# Altium PCB Array.PcbDoc
Units mm, origin at the board's own origin, x right, y up, seen from the top; angles counter-clockwise.
Board outline 125.5 x 125.5 mm, 2 copper layers (Top Layer, Bottom Layer); 20 components, 18 nets, 80 pads, 124 vias.
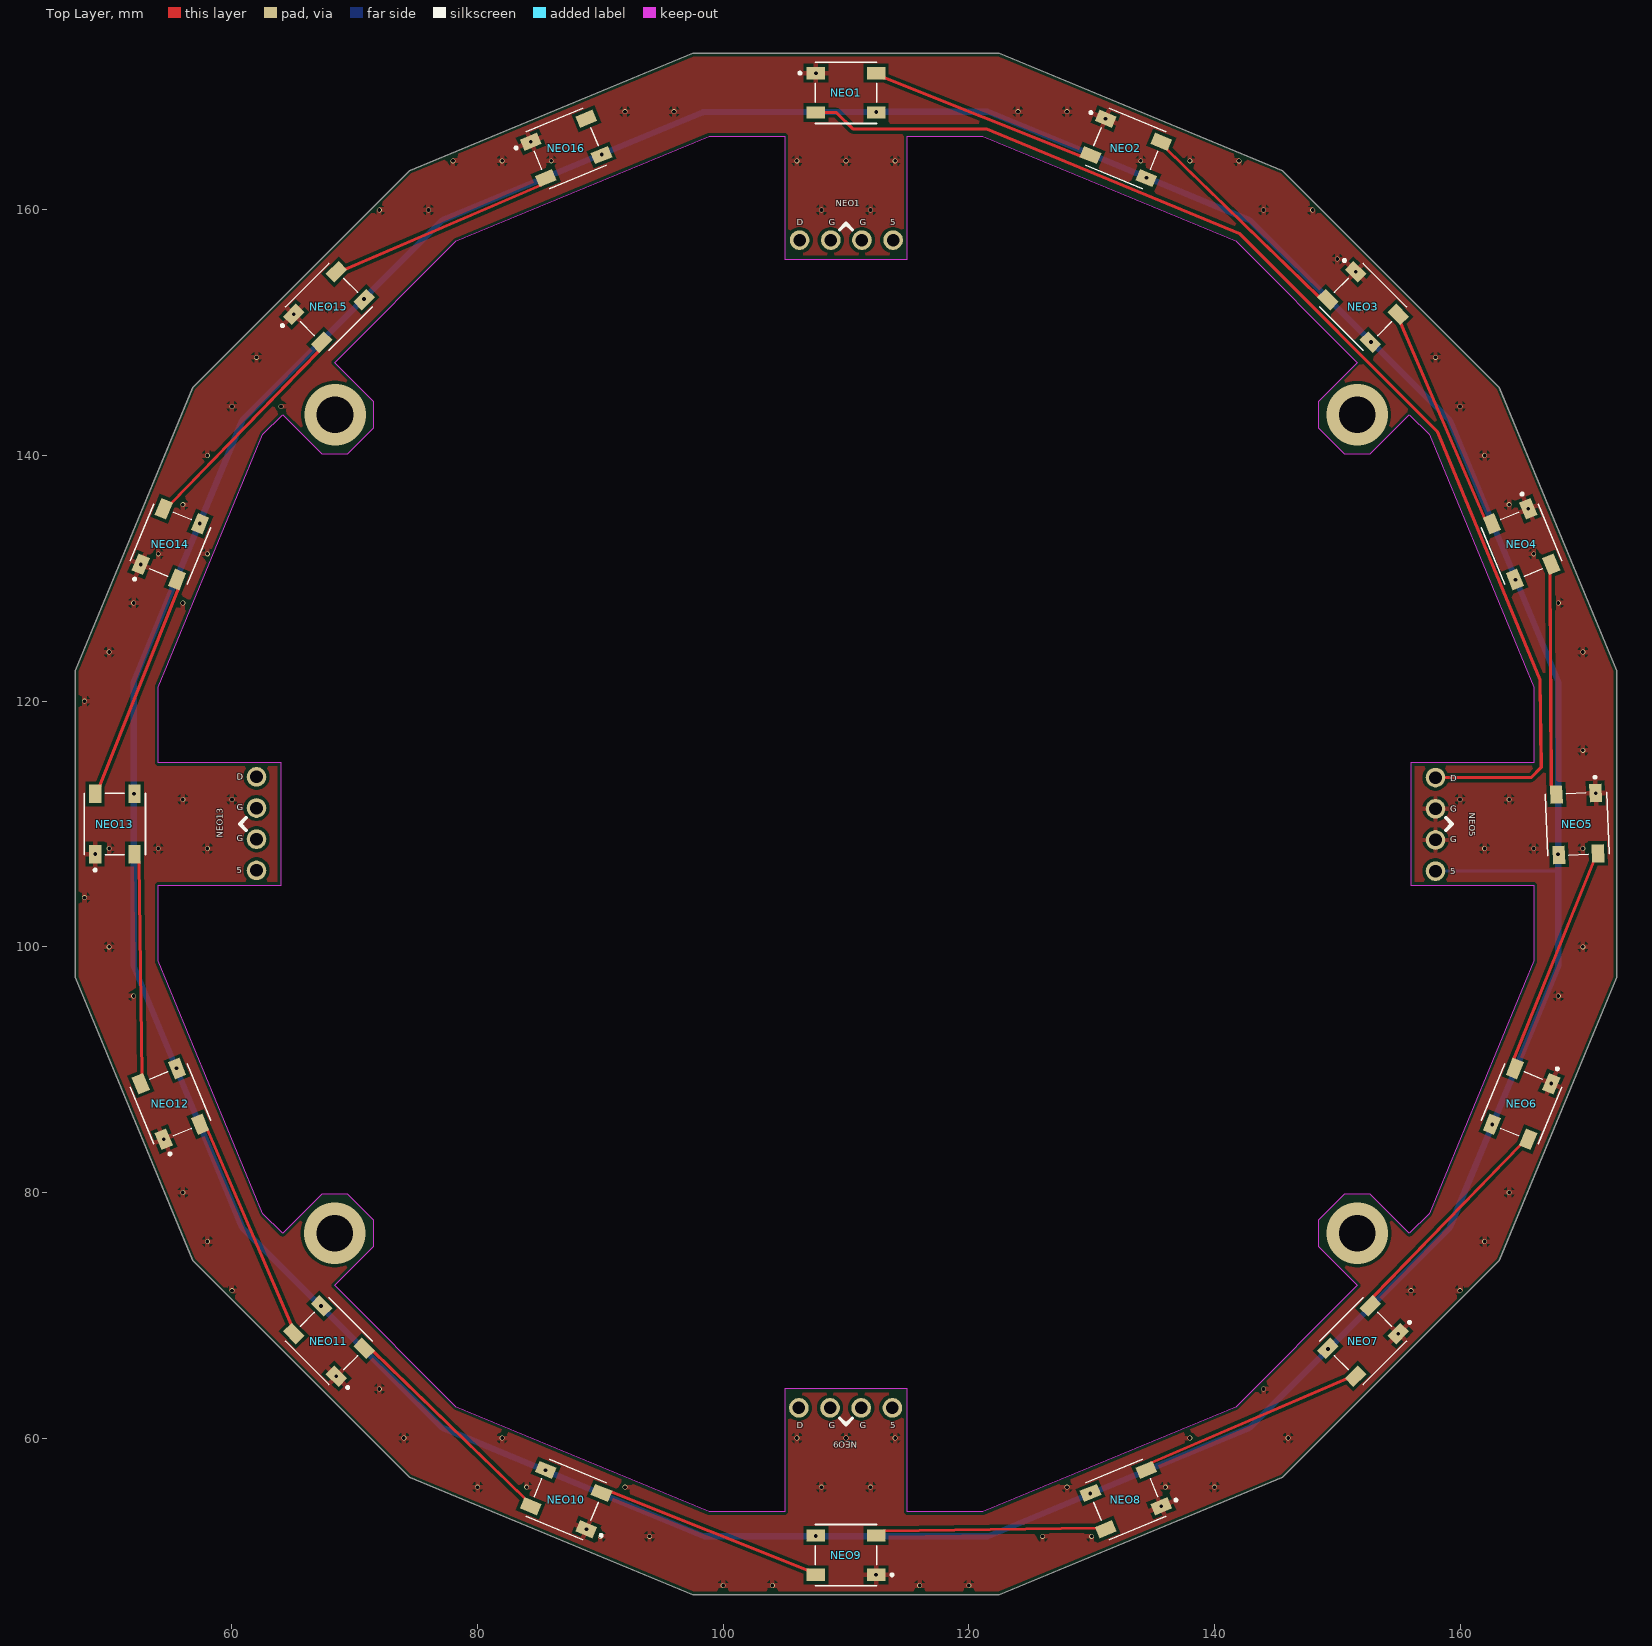
[diagram p0: Top Layer view]
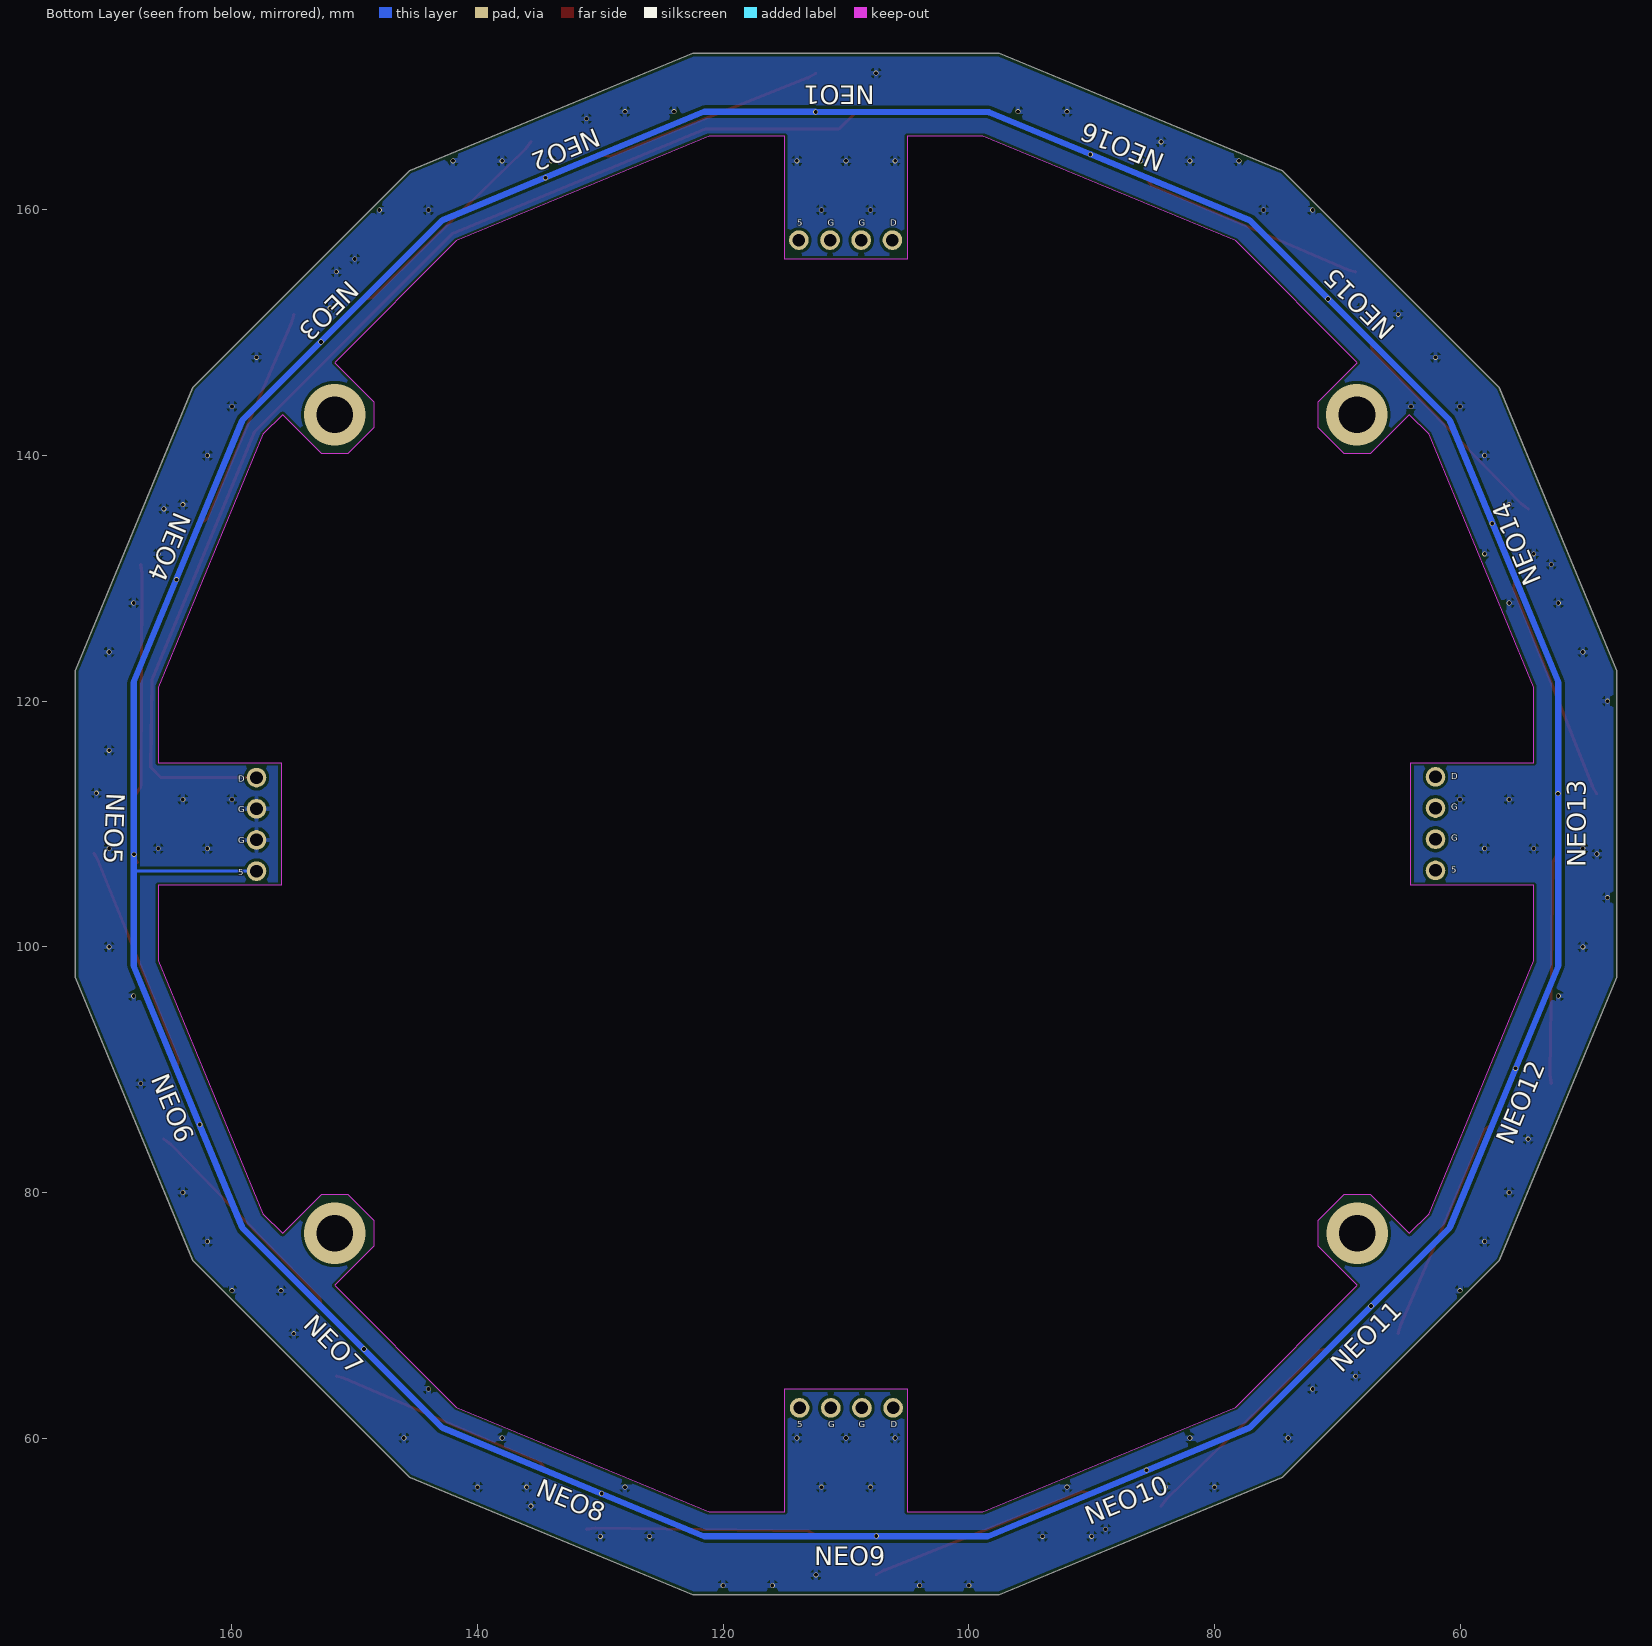
[diagram p1: Bottom Layer view, seen from below]
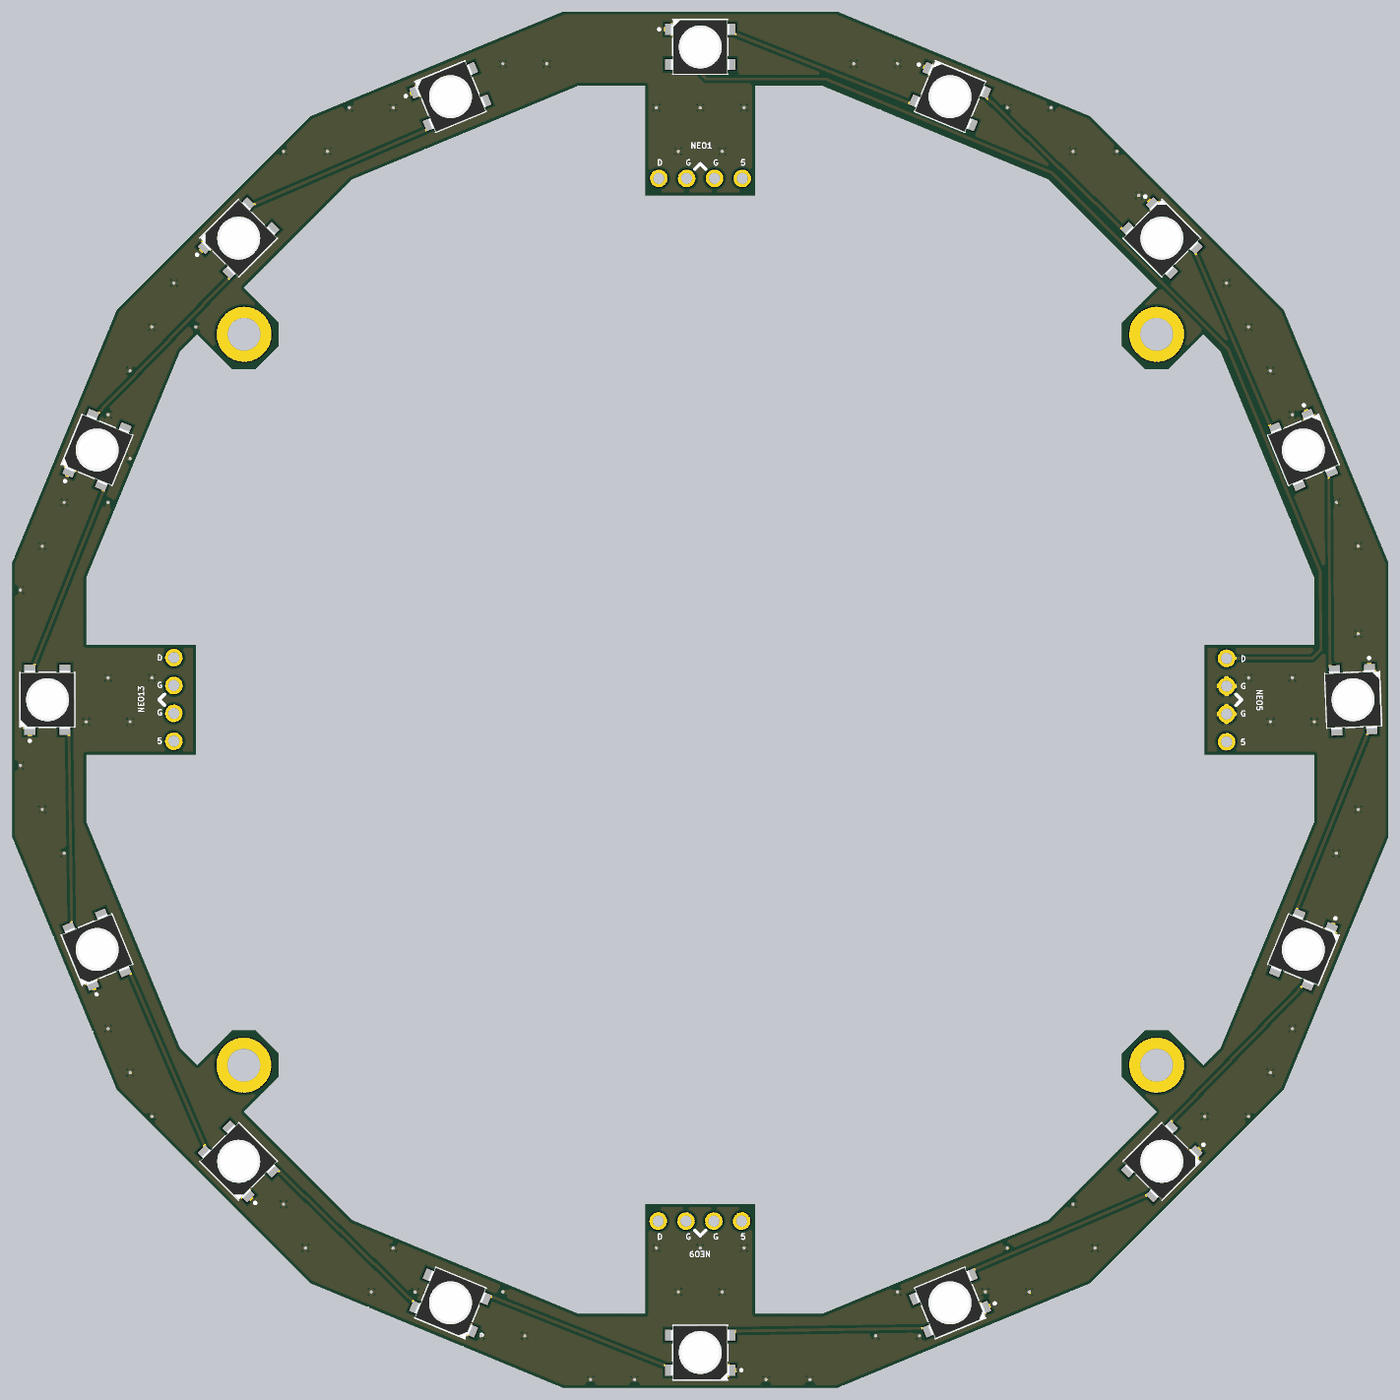
[diagram p2: 3D render of the assembled board from above, using the file's embedded part models]

## Layer stack, top to bottom
Top Solder: solder mask 0.0102, Solder Resist, Dk 3.5
Top Layer: signal copper 0.0356
Dielectric 1: dielectric 0.32, FR-4, Dk 4.8
Bottom Layer: signal copper 0.0356
Bottom Solder: solder mask 0.0102, Solder Resist, Dk 3.5

## Board outline
56.803,74.455 47.25,97.518 47.25,122.482 56.803,145.545 74.455,163.197 97.518,172.75 122.482,172.75 145.545,163.197 163.197,145.545 172.75,122.482 172.75,97.518 163.197,74.455 145.545,56.803 122.482,47.25 97.518,47.25 74.455,56.803
cut-out: 64.136,76.668 62.525,78.279 54,98.861 54,105 64,105 64,115 54,115 54,121.139 62.525,141.721 64.136,143.332 67.318,140.15 69.44,140.15 71.561,142.272 71.561,144.393 68.379,147.575 78.279,157.475 98.861,166 105,166 105,156 115,156 115,166 121.139,166 141.721,157.475 151.621,147.575 148.439,144.393 148.439,142.272 150.56,140.15 152.682,140.15 155.864,143.332 157.475,141.721 166,121.139 166,115 156,115 156,105 166,105 166,98.861 157.475,78.279 155.864,76.668 152.682,79.85 150.56,79.85 148.439,77.728 148.439,75.607 151.621,72.425 141.721,62.525 121.139,54 115,54 115,64 105,64 105,54 98.861,54 78.279,62.525 68.379,72.425 71.561,75.607 71.561,77.728 69.44,79.85 67.318,79.85

## Design rules (kind name [scope] priority, off if disabled: settings)
BoardOutlineClearance [All] p1: gap=0.254 ignorepadtopadclearanceinfootprint=FALSE except(0: Arc-SplitContinuation Track-SplitContinuation SMDPad-SplitContinuation THPad-SplitContinuation Via-SplitContinuation Fill-SplitContinuation Poly-SplitContinuation Region-SplitContinuation Text-SplitContinuation)
Clearance [All] p1: gap=0.254 ignorepadtopadclearanceinfootprint=FALSE
PolygonConnect [All] p1: connectstyle=Relief reliefconductorwidth=0.4 reliefentries=4 polygonreliefangle="90 Angle" airgapwidth=0.254
RoutingVias [All] p1: holewidth=0.711 width=1.27 viastyle="Through Hole" minholewidth=0.711 minwidth=1.27 maxholewidth=0.711 maxwidth=1.27
SolderMaskExpansion [All] p1: expansion=0.102 istentingtop=FALSE
SupplyNets "Schematic Supply Nets_1" [InNet('+5V')] p1: voltage=0.000
SupplyNets "Schematic Supply Nets" [InNet('GND')] p2: voltage=0.000
Width [All] p1: maxlimit=100 minlimit=0.254 preferedwidth=0.254
30 further rules are at their usual default settings.

## Classes and differential pairs
component class NeoArray: g NEO1 NEO2 NEO3 NEO4 NEO5 NEO6 NEO7 NEO8 NEO9 NEO10 NEO11 NEO12 NEO13 NEO14 NEO15 NEO16

## Components (designator, comment, footprint, x,y, rotation, side; value= is the part's Value field where it differs from the comment)
NEO1 "NEOPIXEL-ARRAY" NEOPIXEL-ARRAY 110,157.54 r180 top
NEO1 "NEOPIXEL-5050" NEOPIXEL-5050 110,169.54 r180 top
NEO2 "NEOPIXEL-5050" NEOPIXEL-5050 132.785,165.008 r157.5 top
NEO3 "NEOPIXEL-5050" NEOPIXEL-5050 152.101,152.101 r135 top
NEO4 "NEOPIXEL-5050" NEOPIXEL-5050 165.008,132.785 r112.5 top
NEO5 "NEOPIXEL-ARRAY" NEOPIXEL-ARRAY 158,110 r90 top
NEO5 "NEOPIXEL-5050" NEOPIXEL-5050 169.54,110 r92.25 top
NEO6 "NEOPIXEL-5050" NEOPIXEL-5050 165.008,87.215 r67.5 top
NEO7 "NEOPIXEL-5050" NEOPIXEL-5050 152.101,67.899 r45 top
NEO8 "NEOPIXEL-5050" NEOPIXEL-5050 132.785,54.992 r22.5 top
NEO9 "NEOPIXEL-ARRAY" NEOPIXEL-ARRAY 110,62.46 r0 top
NEO9 "NEOPIXEL-5050" NEOPIXEL-5050 110,50.46 r0 top
NEO10 "NEOPIXEL-5050" NEOPIXEL-5050 87.215,54.992 r337.5 top
NEO11 "NEOPIXEL-5050" NEOPIXEL-5050 67.899,67.899 r315 top
NEO12 "NEOPIXEL-5050" NEOPIXEL-5050 54.992,87.215 r292.5 top
NEO13 "NEOPIXEL-ARRAY" NEOPIXEL-ARRAY 62,110 r270 top
NEO13 "NEOPIXEL-5050" NEOPIXEL-5050 50.46,110 r270 top
NEO14 "NEOPIXEL-5050" NEOPIXEL-5050 54.992,132.785 r247.5 top
NEO15 "NEOPIXEL-5050" NEOPIXEL-5050 67.899,152.101 r225 top
NEO16 "NEOPIXEL-5050" NEOPIXEL-5050 87.215,165.008 r202.5 top

## Footprints (in the part's own frame and the unit in brackets; to place one, negate y for a bottom-side part, rotate by r counter-clockwise, add the part's x,y. Pads: shape width x height; smd on the part's side, far side on the other; paste and mask are expansions set on the pad)
NEOPIXEL-5050 [mm]
  rect 1.5x1 smd: 1(2.45,-1.6) 2(2.45,1.6) 3(-2.45,1.6) 4(-2.45,-1.6)
  silkscreen extent -2.5,-2.5 3.85,2.5, body extent -2.7,-2.49 2.7,2.51, height 1.5
NEOPIXEL-ARRAY [mm]
  round 1.6 hole 1.02: DIN(3.78,0) GND(-1.3,0) GND(1.24,0) VCC(-3.84,0)
  silkscreen extent -0.5,-1.35 0.5,-0.85

## Via types
v1: diameter 0.4, hole 0.3, Top Layer to Bottom Layer, tented both sides, 120 vias
v2: diameter 5, hole 3, Top Layer to Bottom Layer, 4 vias

## Nets (pads, with @x,y where several pads share a name; then routed paths per layer and width w, separated by ;. In a path a pad name is that pad's centre, name@x,y a point inside that pad or via, vN(x,y) a via of type N, cw(c..) or ccw(c..) an arc to the next point about the centre after c; other vN are vias at no path point)
+5V: NEO1.3 NEO2.3 NEO3.3 NEO4.3 NEO5.3 NEO5.VCC NEO6.3 NEO7.3 NEO8.3 NEO9.3 NEO10.3 NEO11.3 NEO12.3 NEO13.3 NEO14.3 NEO15.3 NEO16.3 | length 378.8
  Top Layer w0.254: NEO5.3@167.689,106.852 NEO5.3
  Bottom Layer w0.254: NEO5.VCC 167.96,106.16 168,106.2
  Bottom Layer w0.5: 52,98.5 52,121.5 ; 52.014,98.429 55.462,90.105 60.816,77.18 ; 52.014,121.571 57.362,134.482 60.816,142.82 ; 60.856,77.12 77.12,60.856 ; 60.856,142.88 77.12,159.144 ; 77.18,60.816 85.511,57.365 98.429,52.014 ; 77.18,159.184 90.091,164.532 98.356,167.956 98.453,167.975 v1(112.475,167.975) ; 98.5,52 121.5,52 ; v1@112.475,168 121.5,168 ; 121.571,52.014 129.909,55.468 142.82,60.816 ; 121.571,167.986 134.482,162.638 142.82,159.184 ; 142.88,60.856 159.144,77.12 ; 142.88,159.144 159.144,142.88 ; 159.184,77.18 162.641,85.525 167.986,98.429 ; 159.184,142.82 164.526,129.923 167.986,121.571 ; 168,98.5 168,106.2 168,121.5
  other v1: 107.525,52.025 129.899,55.491 85.527,57.385 149.244,67.255 67.255,70.756 162.615,85.527 55.491,90.101 167.975,107.525 52.025,112.475 164.509,129.899 57.385,134.473 152.745,149.244 70.756,152.745 134.473,162.615 90.101,164.509
DIN1: NEO1.2 NEO5.DIN | length 97.5
  Top Layer w0.254: NEO1.2 109.216,167.94 110.557,166.6 121.466,166.6 142.009,158.091 158.158,141.942 166.525,121.744 166.611,114.611 165.78,113.78 NEO5.DIN
GND: NEO1.1 NEO2.1 NEO3.1 NEO4.1 NEO5.1 NEO5.GND NEO6.1 NEO7.1 NEO8.1 NEO9.1 NEO10.1 NEO11.1 NEO12.1 NEO13.1 NEO14.1 NEO15.1 NEO16.1
  other v1: 100,48 104,48 116,48 120,48 112.45,48.86 90,52 94,52 126,52 130,52 88.866,52.576 135.661,54.452 80,56 84,56 92,56 108,56 112,56 128,56 136,56 140,56 74,60 82,60 106,60 110,60 114,60 138,60 146,60 72,64 144,64 68.5,65.035 154.965,68.5 60,72 156,72 160,72 58,76 162,76 56,80 164,80 54.452,84.339 167.424,88.866 52,96 168,96 50,100 170,100 48,104 48.86,107.55 50,108 54,108 58,108 162,108 166,108 170,108 56,112 60,112 160,112 164,112 171.043,112.511 170,116 48,120 50,124 170,124 52,128 56,128 168,128 52.576,131.134 54,132 58,132 166,132 165.548,135.661 56,136 164,136 58,140 162,140 60,144 64,144 160,144 62,148 158,148 65.035,151.5 68,152 152,152 151.5,154.965 150,156 72,160 76,160 108,160 112,160 144,160 148,160 78,164 82,164 86,164 106,164 110,164 114,164 134,164 138,164 142,164 84.339,165.548 131.134,167.424 92,168 96,168 124,168 128,168 107.55,171.14
NetNEO1_4: NEO1.4 NEO2.2 | length 18.8
  Top Layer w0.254: NEO1.4 113.073,170.767 129.191,164.361 NEO2.2
NetNEO2_4: NEO2.4 NEO3.2 | length 18.8
  Top Layer w0.254: NEO2.4 136.094,164.965 148.533,152.879 NEO3.2
NetNEO3_4: NEO3.4 NEO4.2 | length 18.8
  Top Layer w0.254: NEO3.4 155.142,150.796 162.009,134.869 NEO4.2
NetNEO4_4: NEO4.4 NEO5.2 | length 18.9
  Top Layer w0.254: NEO4.4 167.317,130.415 167.425,113.191 ccw(c167.679,113.193) 167.427,113.161 167.448,112.993 NEO5.2
NetNEO5_4: NEO5.4 NEO6.2 | length 18.9
  Top Layer w0.254: NEO6.2 164.361,90.809 170.887,106.977 NEO5.4
NetNEO6_4: NEO6.4 NEO7.2 | length 18.8
  Top Layer w0.254: NEO7.2 152.879,71.467 164.965,83.906 NEO6.4
NetNEO7_4: NEO7.4 NEO8.2 | length 18.8
  Top Layer w0.254: NEO8.2 134.869,57.991 150.796,64.858 NEO7.4
NetNEO8_4: NEO8.4 NEO9.2 | length 18.8
  Top Layer w0.254: NEO9.2 113.073,52.433 130.415,52.683 NEO8.4
NetNEO9_4: NEO9.4 NEO10.2 | length 18.8
  Top Layer w0.254: NEO10.2 90.809,55.639 106.927,49.233 NEO9.4
NetNEO10_4: NEO10.4 NEO11.2 | length 18.8
  Top Layer w0.254: NEO11.2 71.467,67.121 83.906,55.035 NEO10.4
NetNEO11_4: NEO11.4 NEO12.2 | length 18.8
  Top Layer w0.254: NEO12.2 57.991,85.131 64.858,69.204 NEO11.4
NetNEO12_4: NEO12.4 NEO13.2 | length 18.8
  Top Layer w0.254: NEO13.2 52.433,106.927 52.683,89.585 NEO12.4
NetNEO13_4: NEO13.4 NEO14.2 | length 18.8
  Top Layer w0.254: NEO13.4 49.233,113.073 55.639,129.191 NEO14.2
NetNEO14_4: NEO14.4 NEO15.2 | length 18.8
  Top Layer w0.254: NEO14.4 55.035,136.094 67.121,148.533 NEO15.2
NetNEO15_4: NEO15.4 NEO16.2 | length 18.8
  Top Layer w0.254: NEO15.4 69.204,155.142 85.131,162.009 NEO16.2
pads on no net: NEO1.DIN NEO1.GND NEO1.VCC NEO9.DIN NEO9.GND NEO9.VCC NEO13.DIN NEO13.GND NEO13.VCC NEO16.4
copper on no net:
  other v2: 68.375,76.675 151.625,76.675 68.4,143.325 151.625,143.325

## Polygon pours and split planes (outlines as drawn)
GND on Bottom Layer "GND_L02_P000" (solid, pour order 0): 45,175 175,175 175,45 45,45
GND on Top Layer "GND_L01_P001" (solid, pour order 1): 45,175 175,175 175,45 45,45

## Silkscreen, mask and mechanical layers (free items; w line width, h text height)
Top Overlay:
  text "D" at 106,158.74 h0.5
  text "G" at 108.6,158.74 h0.5
  text "G" at 111.1,158.74 h0.5
  text "5" at 113.6,158.74 h0.5
  text "D" at 60.4,113.6 h0.5
  text "D" at 159.2,113.5 h0.5
  text "G" at 60.4,111.1 h0.5
  text "G" at 159.2,111 h0.5
  text "G" at 60.4,108.6 h0.5
  text "G" at 159.2,108.5 h0.5
  text "5" at 60.4,106 h0.5
  text "5" at 159.2,105.9 h0.5
  text "D" at 106,60.8 h0.5
  text "G" at 108.6,60.8 h0.5
  text "G" at 111.1,60.8 h0.5
  text "5" at 113.6,60.8 h0.5
Bottom Overlay:
  text "D" at 106.38,158.7 h0.5
  text "G" at 108.98,158.7 h0.5
  text "G" at 111.48,158.7 h0.5
  text "5" at 113.98,158.7 h0.5
  text "D" at 60.7,113.64 h0.5
  text "D" at 159.5,113.44 h0.5
  text "G" at 60.7,111.14 h0.5
  text "G" at 159.5,110.94 h0.5
  text "G" at 60.7,108.64 h0.5
  text "G" at 159.5,108.44 h0.5
  text "5" at 60.7,106.04 h0.5
  text "5" at 159.5,105.84 h0.5
  text "D" at 106.36,60.86 h0.5
  text "G" at 108.96,60.86 h0.5
  text "G" at 111.46,60.86 h0.5
  text "5" at 113.96,60.86 h0.5
Mechanical 1:
  circle w0.013: c68.379,143.332 r1.5
  circle w0.013: c151.621,143.332 r1.5
  circle w0.013: c151.621,76.668 r1.5
  circle w0.013: c68.379,76.668 r1.5
  lines w0.013: 54,98.861 62.525,78.279 64.136,76.668 67.318,79.85 69.44,79.85 71.561,77.728 71.561,75.607 68.379,72.425 78.279,62.525 98.861,54 105,54 105,64 115,64 115,54 121.139,54 141.721,62.525 151.621,72.425 148.439,75.607 148.439,77.728 150.56,79.85 152.682,79.85 155.864,76.668 157.475,78.279 166,98.861 166,105 156,105 156,115 166,115 166,121.139 157.475,141.721 155.864,143.332 152.682,140.15 150.56,140.15 148.439,142.272 148.439,144.393 151.621,147.575 141.721,157.475 121.139,166 115,166 115,156 105,156 105,166 98.861,166 78.279,157.475 68.379,147.575 71.561,144.393 71.561,142.272 69.44,140.15 67.318,140.15 64.136,143.332 62.525,141.721 54,121.139 54,115 64,115 64,105 54,105 54,98.861